# Altium PCB test.PcbDoc
Units mm, origin at the board's own origin, x right, y up, seen from the top; angles counter-clockwise.
Board outline 59 x 75 mm, 2 copper layers (Top Layer, Bottom Layer); 11 components, 42 nets, 52 pads, 0 vias.
Unrouted connection lines stored in the file: 17.
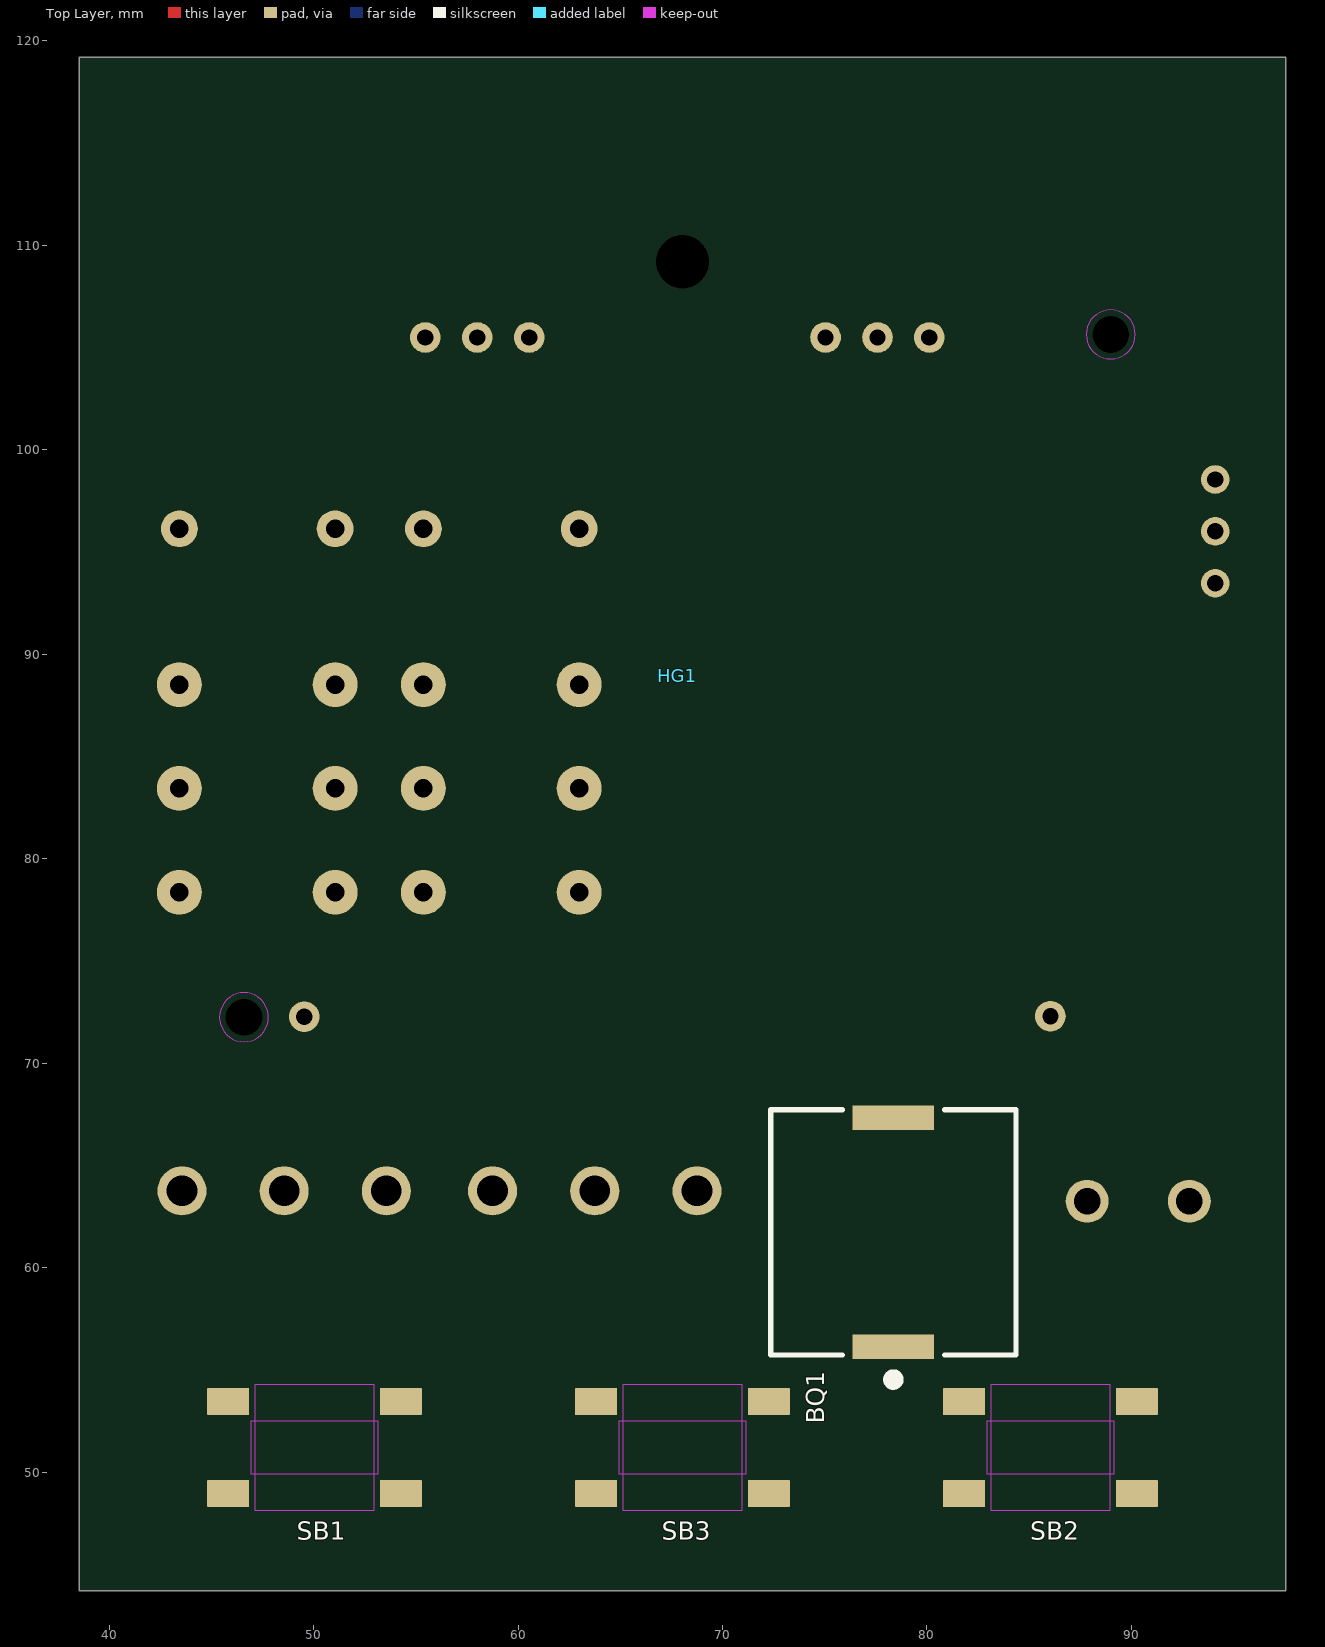
[diagram p0: Top Layer view]
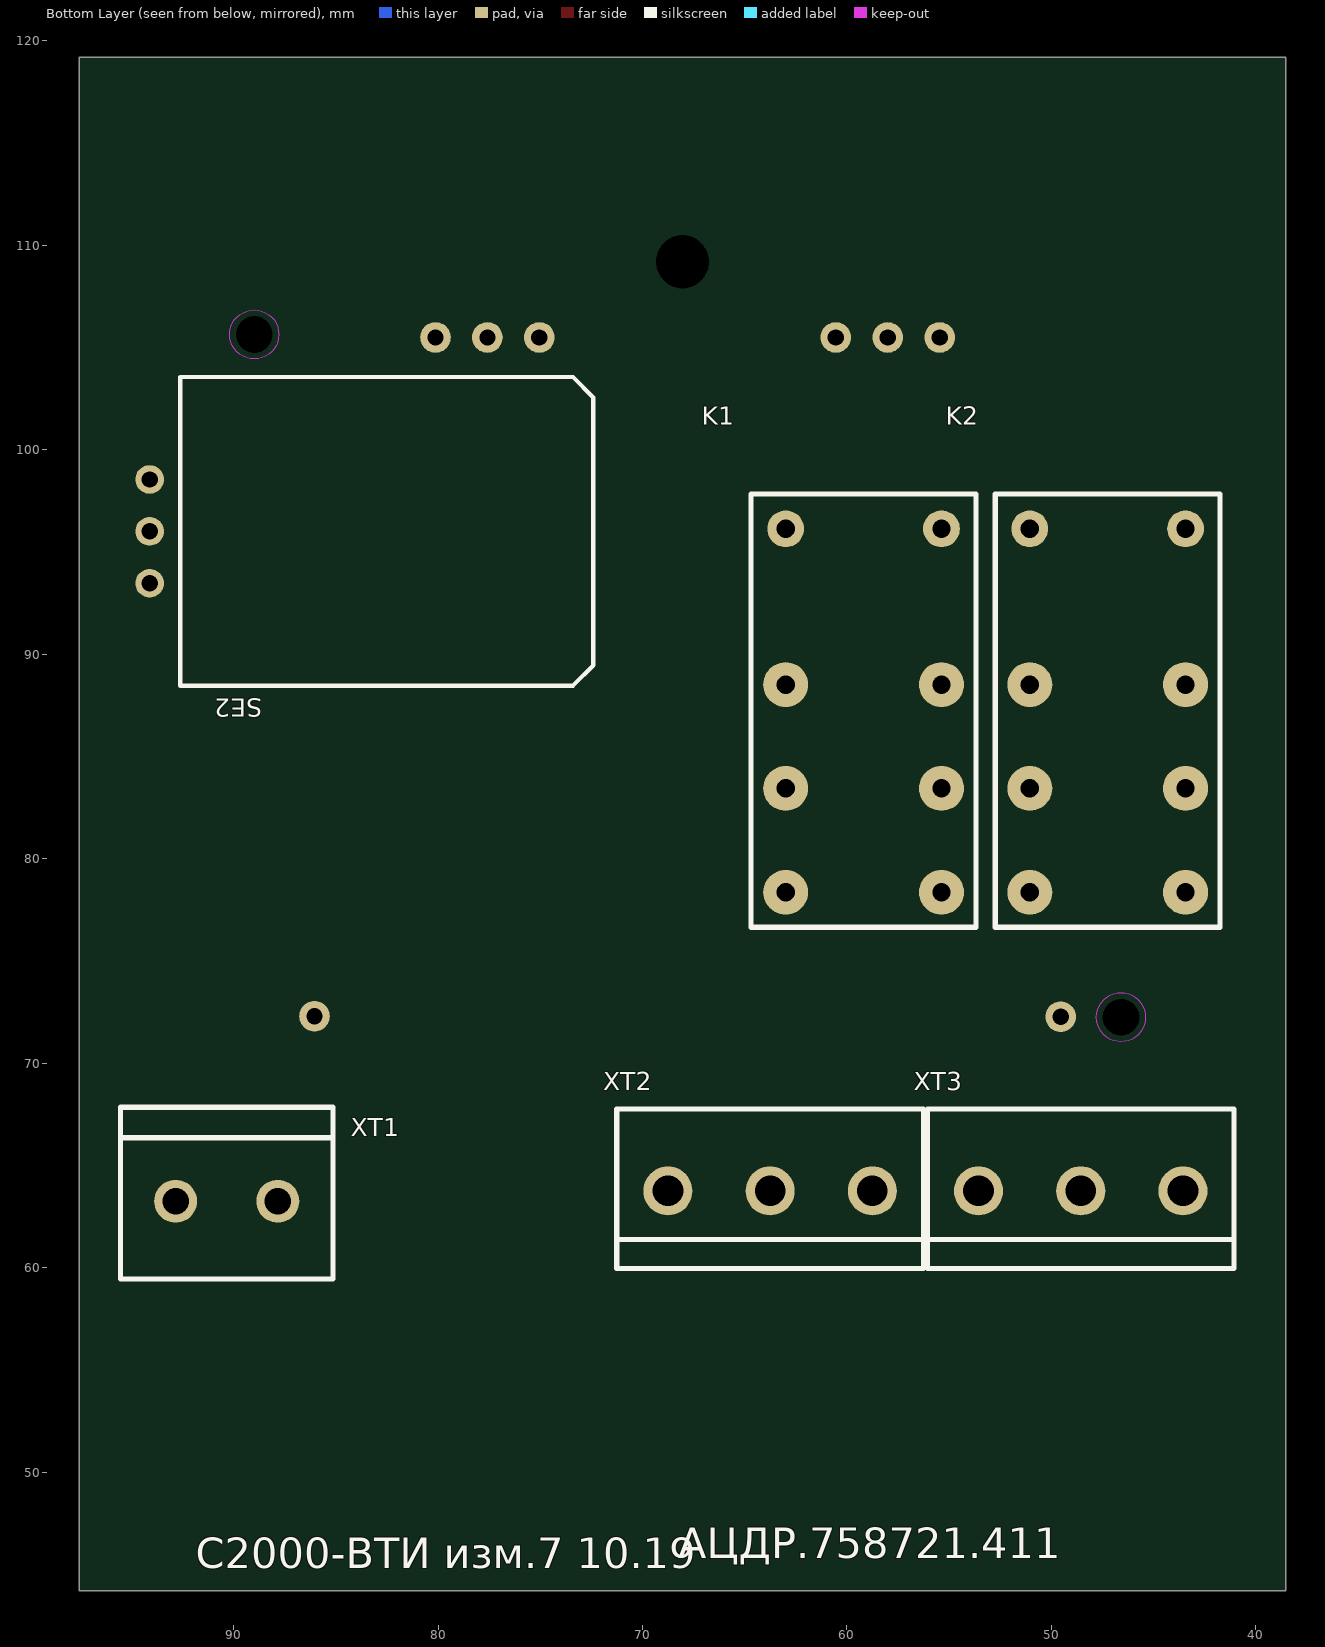
[diagram p1: Bottom Layer view, seen from below]

## Layer stack, top to bottom
Top Solder: solder mask 0.0102, Solder Resist, Dk 3.5
Top Layer: signal copper 0.0356
Dielectric 1: dielectric 0.32, FR-4, Dk 4.8
Bottom Layer: signal copper 0.0356
Bottom Solder: solder mask 0.0102, Solder Resist, Dk 3.5

## Board outline
38.543,44.198 97.543,44.198 97.543,119.198 38.543,119.198

## Design rules (kind name [scope] priority, off if disabled: settings)
Clearance [All] p1: gap=0.254 ignorepadtopadclearanceinfootprint=FALSE except(0: Arc-Hole Track-Hole SMDPad-Hole THPad-Hole Via-Hole Fill-Hole Poly-Hole Region-Hole Text-Hole)
PolygonConnect [All] p1: connectstyle=Relief reliefconductorwidth=0.254 reliefentries=4 polygonreliefangle="90 Angle" airgapwidth=0.254
RoutingVias [All] p1: holewidth=0.711 width=1.27 viastyle="Through Hole" minholewidth=0.711 minwidth=1.27 maxholewidth=0.711 maxwidth=1.27
SolderMaskExpansion [All] p1: expansion=0.102 istentingtop=FALSE
Width [All] p1: maxlimit=0.254 minlimit=0.254 preferedwidth=0.254
30 further rules are at their usual default settings.

## Classes and differential pairs
component class ОКР_ВТИ_20_изм.0: HG1 K1 K2 SB1 SB2 SB3 XT1 XT2 XT3

## Components (designator, comment, footprint, x,y, rotation, side; value= is the part's Value field where it differs from the comment)
BQ1 "PKLCS1212E4001-R1" PKLCS1212E4001 78.359,61.722 r90 top
HG1 "TIC5234" TIC5234_1 55.463,105.498 r0 top locked
K1 "G5V-2-H1 5DC BY OMZ" G5V-2 55.372,96.139 r180 bottom value=5VDC
K2 "G5V-2-H1 5DC BY OMZ" G5V-2 43.434,96.139 r180 bottom value=5VDC
SB1 "DTSM-62N-V-T/R" DTSM-62N_nonstandard 50.043,51.198 r180 top locked value=SMD_6.0x6.0
SB2 "DTSM-62N-V-T/R" DTSM-62N_nonstandard 86.043,51.198 r180 top locked value=SMD_6.0x6.0
SB3 "DTSM-62N-V-T/R" DTSM-62N_nonstandard 68.043,51.198 r180 top locked value=SMD_6.0x6.0
SE2 "NAP-508R" NAP-508R 82.507,96.002 r270 bottom
XT1 "ETB11020B000Z" ETB1102 90.337,63.246 r180 bottom
XT2 "DG 126-03P-14" DG126-5-03P 63.754,63.754 r180 bottom
XT3 "DG 126-03P-14" DG126-5-03P 48.561,63.754 r180 bottom

## Footprints (in the part's own frame and the unit in brackets; to place one, negate y for a bottom-side part, rotate by r counter-clockwise, add the part's x,y. Pads: shape width x height; smd on the part's side, far side on the other; paste and mask are expansions set on the pad)
DG126-5-03P [mm]
  round 2.4 hole 1.5: 1(-5,0) 2(0,0) 3(5,0)
  silkscreen extent -7.5,-3.8 7.5,4, body extent -8,-3.8 7.5,4, height 10.2
DTSM-62N_nonstandard [mm] "6x6mm Tact Switch, but pin-to-pin = 10mm. H=5.0mm."
  rrect2% 2.05x1.3 smd: COM(-4.225,2.25) COM(4.225,2.25) NO(-4.225,-2.25) NO(4.225,-2.25)
  Top Layer keep-out region: -3.1,-1.3 -3.1,1.3 3.1,1.3 3.1,-1.3
  Top Layer keep-out region: -2.9,-3.1 -2.9,3.1 2.9,3.1 2.9,-3.1
  body extent -4.5,-3.1 4.5,3.1, height 5
ETB1102 [mm]
  round 2.1 hole 1.3: 1(-2.5,0) 2(2.5,0)
  silkscreen extent -5.2,-3.8 5.2,4.6, body extent -5.4,-3.6 5,4.4, height 11
G5V-2 [mm] "OMRON"
  round 1.8 hole 0.9: A1(0,0) A2(-7.62,0)
  round 2.2 hole 0.9: COM1(0,-7.62) COM2(-7.62,-7.62) NC1(0,-12.7) NC2(-7.62,-12.7) NO1(0,-17.78) NO2(-7.62,-17.78)
  silkscreen extent -9.31,-19.49 1.69,1.71, body extent -8.86,-19.1 1.24,1.4, height 11.5
NAP-508R [mm] "Датчик концентрации СО электрохимический"
  round 1.4 hole 0.8: C(-2.55,-11.6) R(2.53,-11.6) W(-0.01,-11.6)
  silkscreen extent -7.56,-10.1 7.54,10.1, body extent -7.55,-11.9 7.55,10.1, height 8.5
PKLCS1212E4001 [mil]
  rect 47.3x157.5 smd paste-787.4: 1(-220.5,0) 2(220.5,0)
  silkscreen extent -293,-236 236,236, body extent -241,-241 241,241, height 118
TIC5234_1 [mm] "Версия с подставкой."
  round 0 hole 1.8 unplated: 0(-8.87,-33.25) 0(33.53,0.15)
  round 1.5 hole 0.8: 1(0,0) 2(2.54,0) 3(5.08,0) 4(19.58,0) 5(22.12,0) 6(24.66,0) 7(-5.92,-33.225) 8(30.58,-33.2)
  Keep-Out Layer circle w0.01: c-8.87,-33.25 r1.2
  Keep-Out Layer circle w0.01: c33.53,0.15 r1.2
  body extent -10.05,-34.41 34.64,1.28, height 6.21

## Part data
BQ1: "Излучатель звуковой SMD PKLCS1212E4001-R1", TempRange=-40…+85, ComponentLink1Description=Manufacturer, ComponentLink2Description=Datasheet, ComponentLink2URL=\\192.168.11.60\BolidLibrary\Altium\Database\Datasheets\425462442.pdf, ComponentLink3Description="Datasheet 2", ComponentLink4Description="Datasheet 3", ComponentVersion=0, Creator="Качанов С.В.", Developer_ID=340722519, DeveloperMnemocod=PKLCS1212E4001-R1, DeveloperRecomend=Желательно, Name=PKLCS1212E4001-R1, Part Number=PKLCS1212E4001-R1, PatternVersion=0
HG1: "ЖК дисплей TIC5234", ComponentLink1Description=Manufacturer, ComponentLink2Description=Datasheet, ComponentLink3Description="Datasheet 2", ComponentLink4Description="Datasheet 3", ComponentVersion=0, Creator="Гайсумов Р.А.", Developer_ID=767047942, DeveloperMnemocod=TIC5234, Name=TIC5234, Part Number=TIC5234, Pattern2Version=0, PatternVersion=0
K1 K2: "Реле G5V-2-H1 5DC BY OMZ", Manufacturer=OMRON, ComponentHeight=11.4, ComponentLink1Description=Manufacturer, ComponentLink1URL=http://components.omron.eu/Products/Relays, ComponentLink2Description=Datasheet, ComponentLink2URL=\\192.168.11.60\BolidLibrary\Altium\Database\Datasheets\171599433.pdf, ComponentLink3Description="Datasheet 2", ComponentLink4Description="Datasheet 3", ComponentVersion=0, Creator="Кравченко И.С.", Developer_ID=171559906, DeveloperMnemocod="G5V-2-H1 5DC BY OMZ", DeveloperRecomend=Желательно, Name="G5V-2-H1 5DC BY OMZ", Part Number="G5V-2-H1 5DC BY OMZ", PatternVersion=1, Type=DPDT
SB1 SB2 SB3: "Кнопка тактовая SMD DTSM-62N-V-T/R", Manufacturer=Diptronics, ComponentHeight=5, ComponentLink1Description=Manufacturer, ComponentLink1URL=http://www.dip.com.tw/en, ComponentLink2Description=Datasheet, ComponentLink2URL=\\192.168.11.60\BolidLibrary\Altium\Database\Datasheets\444395103.jpg, ComponentLink3Description="Datasheet 2", ComponentLink4Description="Datasheet 3", ComponentLink4URL=http://www.dip.com.tw/en/en-product-information/en-switch004/item/download/863_75cf97940e3cff15ad824b722ff03675, ComponentVersion=0, Creator="Кравченко И.С.", Developer_ID=273476920, DeveloperMnemocod=DTSM-62N-V-T/R, DeveloperRecomend=Желательно, Name=DTSM-62N-V-T/R, Note="Заказная кнопка!!! Расстояние между выводами 10мм!!!", Part Number=DTSM-62N-V-T/R, PatternVersion=0, Type="Tact Switch"
SE2: "Датчик угарного газа NAP-508R", Manufacturer=Nemoto, TempRange=-20…+50°C, ComponentHeight=8.5mm, ComponentLink1Description=Manufacturer, ComponentLink2Description=Datasheet, ComponentLink2URL=\\192.168.11.60\BolidLibrary\Altium\Database\Datasheets\711900577.pdf, ComponentLink3Description="Datasheet 2", ComponentLink4Description="Datasheet 3", ComponentVersion=0, Creator="Рылов Д.В.", Developer_ID=711906605, DeveloperMnemocod=NAP-508R, Name=NAP-508R, Part Number=NAP-508R, PatternVersion=0, Type=K-Band
XT1: "Плата соединительная ETB11020B000Z", Circuit_1=+8...28V, Circuit_2=GND, ComponentLink1Description=Manufacturer, ComponentLink2Description=Datasheet, ComponentLink2URL=\\192.168.11.60\BolidLibrary\Altium\Database\Datasheets\210788742.pdf, ComponentLink3Description="Datasheet 2", ComponentLink4Description="Datasheet 3", ComponentVersion=0, Creator="Турнаев С.С.", Developer_ID=92112599, DeveloperMnemocod=ETB11020B000Z, Name=ETB11020B000Z, Part Number=ETB11020B000Z, PatternVersion=3
XT2 XT3: "Колодка клеммная DG 126-03P-14", TempRange=-40…+105°С, ComponentLink1Description=Manufacturer, ComponentLink2Description=Datasheet, ComponentLink2URL=\\192.168.11.60\BolidLibrary\Altium\Database\Datasheets\551074543.pdf, ComponentLink3Description="Datasheet 2", ComponentLink4Description="Datasheet 3", ComponentVersion=0, Creator="Левин И.В.", Developer_ID=288576421, DeveloperMnemocod="DG 126-03P-14", DeveloperRecomend=Желательно, Name="DG 126-03P-14", Part Number="DG 126-03P-14", PatternVersion=0
  XT2: Circuit_1=NO1, Circuit_2=NC1, Circuit_3=COM1
  XT3: Circuit_1=NO2, Circuit_2=NC2, Circuit_3=COM2

## Free pads (board coordinates)
  round 0 hole 2.6 unplated: 0(68.043,109.198)

## Nets (pads, with @x,y where several pads share a name; then routed paths per layer and width w, separated by ;. In a path a pad name is that pad's centre, name@x,y a point inside that pad or via, vN(x,y) a via of type N, cw(c..) or ccw(c..) an arc to the next point about the centre after c; other vN are vias at no path point)
+3.3B: HG1.1
+5V: K1.A1 K2.A1
A_IN: 
COM1: K1.COM1 K1.COM2 XT2.3
COM2: K2.COM1 K2.COM2 XT3.3
GND: HG1.2 SB1.COM SB2.COM SB3.COM XT1.2
LCD_CLK: HG1.5
LCD_DATA: HG1.4
LCD_LOAD: HG1.3
NC1: K1.NC1 K1.NC2 XT2.2
NC2: K2.NC1 K2.NC2 XT3.2
Net3_1: 
NetBQ1_2: 
NetC2_1: 
NetC5_1: 
NetC7_1: 
NetC13_1: 
NetC13_2: 
NetC18_1: 
NetC18_2: 
NetC19_2: 
NetC20_1: 
NetD2_3: 
NetK1_A2: K1.A2
NetK2_A2: K2.A2
NetR5_2: 
NetR12_1: 
NetR13_1: 
NetR14_2: 
NetRI1_2: 
NO1: K1.NO1 K1.NO2 XT2.1
NO2: K2.NO1 K2.NO2 XT3.1
PGD: 
PWR: XT1.1
RELE_1: 
RELE_2: 
SCL: 
SDA: 
SW1: SB1.NO
SW2: SB2.NO
SW3: SB3.NO
Vco: 
pads on no net: BQ1.1 BQ1.2 HG1.0 HG1.6 HG1.7 HG1.8 SE2.C SE2.R SE2.W

## Other copper
Top Layer:
  pour cut-out: 65.543,109.448 cw(c67.912,109.329) 68.031,111.698 cw(c68.031,109.198) 70.531,109.198 cw(c68.031,109.198) 68.031,106.698 cw(c68.162,109.317)
Bottom Layer:
  pour cut-out: 65.555,109.447 cw(c67.925,109.329) 68.043,111.698 cw(c68.043,109.198) 70.543,109.198 cw(c68.043,109.198) 68.043,106.698 cw(c68.174,109.316)

## Silkscreen, mask and mechanical layers (free items; w line width, h text height)
Bottom Overlay:
  text "АЦДР.758721.411" at 68.243,45.298 h2.52
  text "С2000-ВТИ изм.7 10.19" at 91.843,44.798 h2.52
Mechanical 1:
  circle w0.254: c68.043,109.198 r1.3
  lines w0.254: 38.543,44.198 97.543,44.198 97.543,119.198 38.543,119.198 38.543,44.198